# EAGLE board DigitalSandbox (EAGLE 6.5.0)
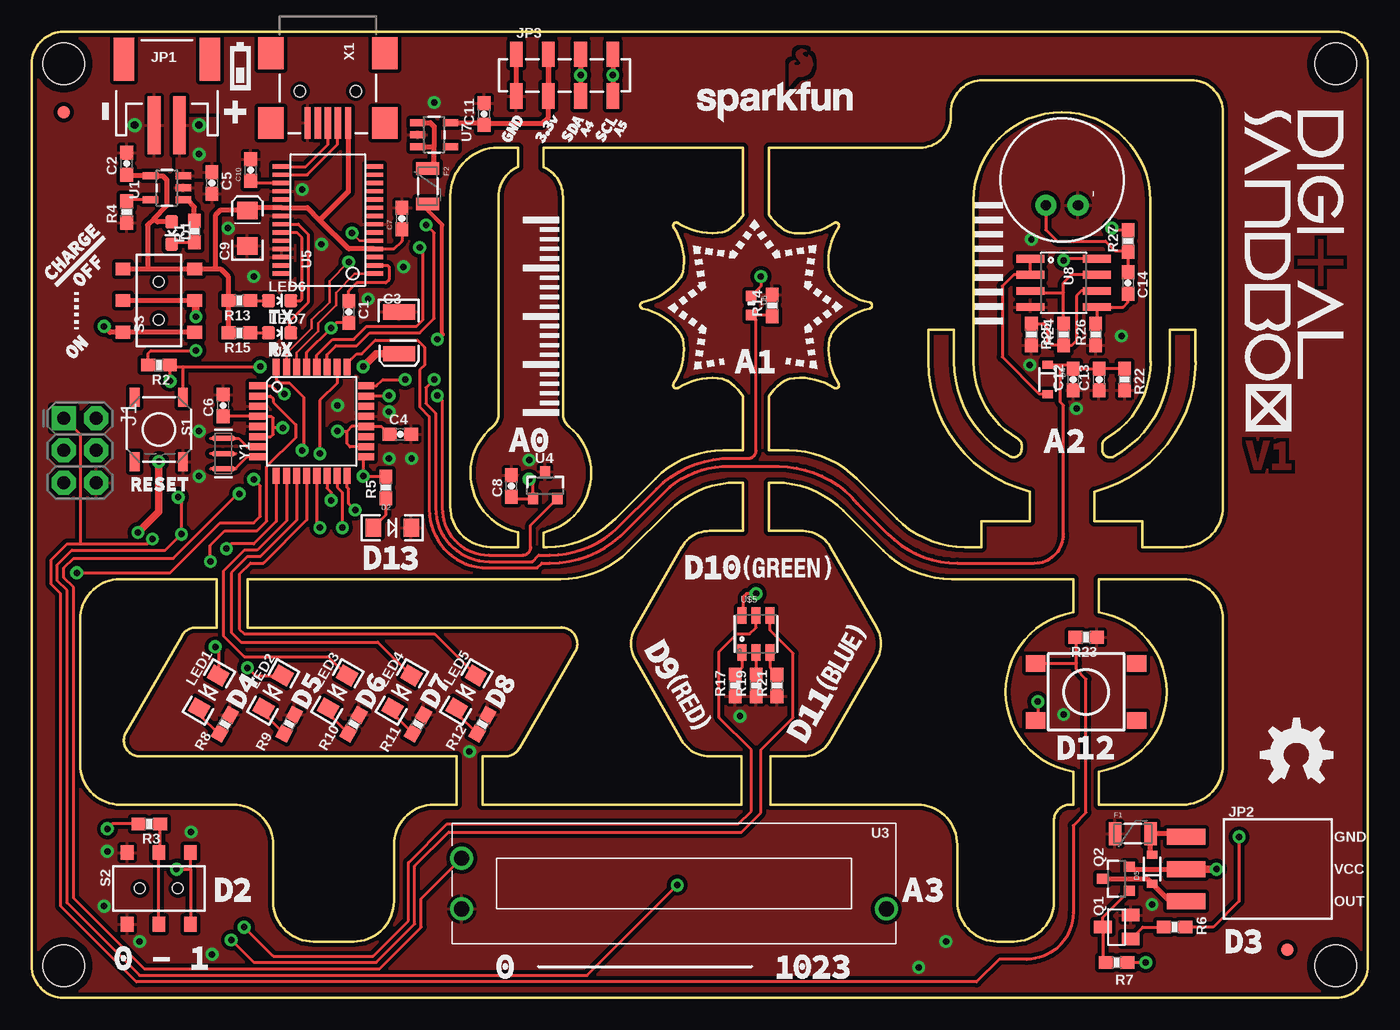
[diagram p0: board, top side]
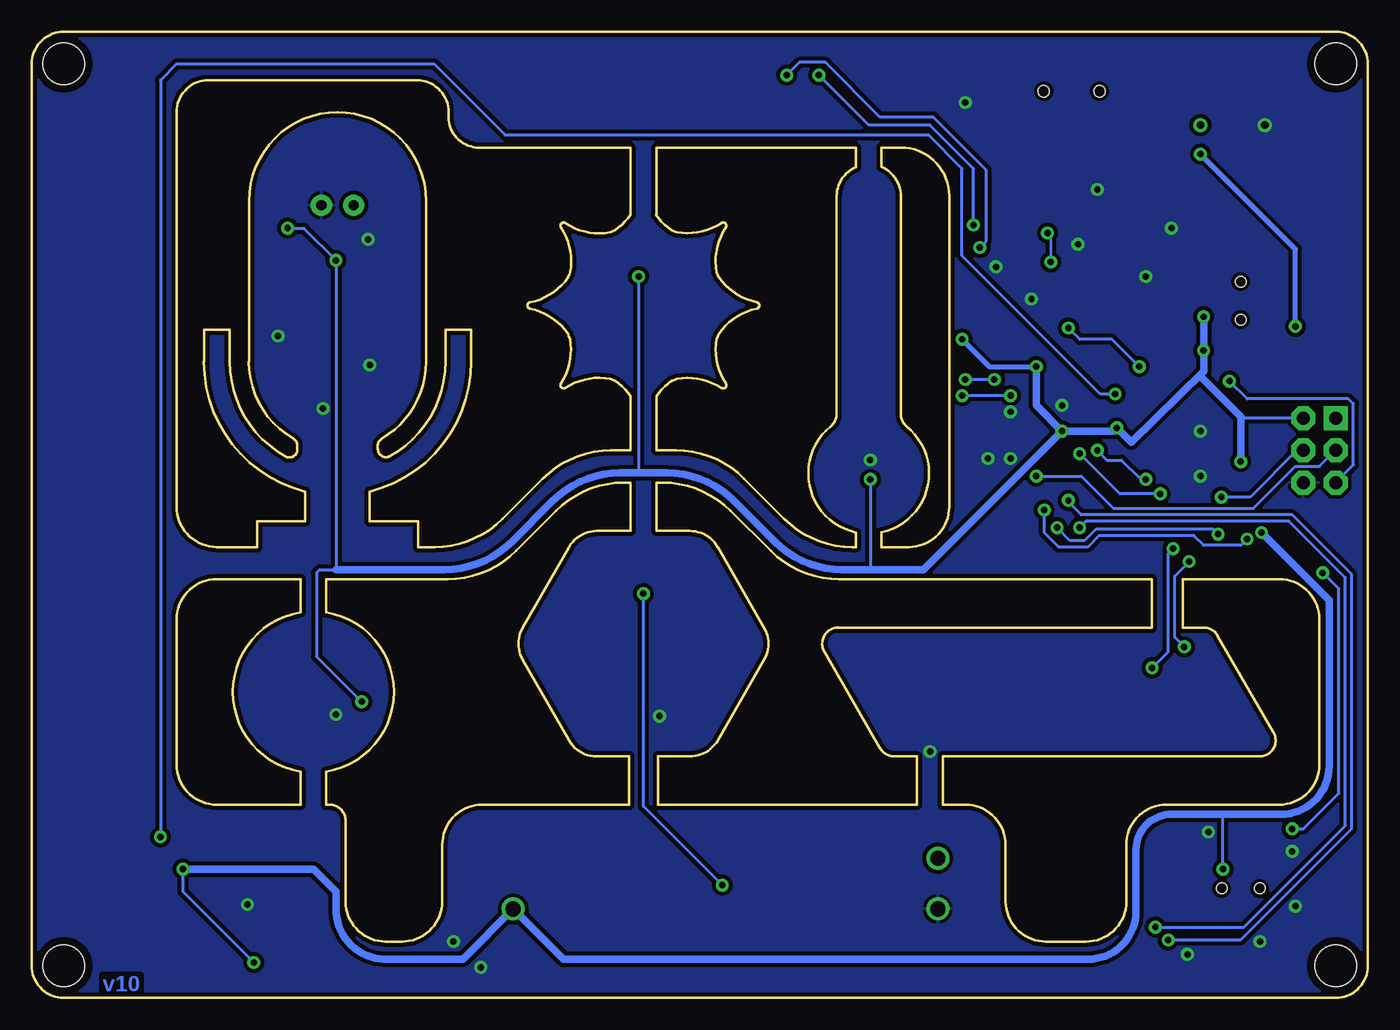
[diagram p1: board, bottom side, seen from below]

Size 105.41 x 76.2 mm. Coordinates in mm from the lower left corner, seen from the top.
Outline: 11.86,28.58 arc-60 12.95,29.21 14.61,29.21 14.61,33.02 6.99,33.02 arc90 3.81,29.84 3.81,18.41 arc90 6.99,15.24 15.88,15.24 arc-90 19.05,12.06 19.05,7.62 arc90 22.23,4.45 25.4,4.45 arc90 28.57,7.62 28.57,12.06 arc-90 31.75,15.24 33.53,15.24 33.53,19.05 8.56,19.05
Outline: 8.56,19.05 arc-120 7.44,20.95 11.86,28.57
Outline: 38.47,19.69 arc-60 37.36,19.05 35.56,19.05 35.56,15.24 56.01,15.24 56.01,19.05 53.49,19.05
Outline: 41.78,29.21 arc-119 42.88,27.3 38.48,19.68
Outline: 41.78,29.21 17.04,29.21 17.04,33.02 41.71,33.02 arc45 47.09,35.25
Outline: 47.09,35.26 50.27,38.41
Outline: 72.59,33.02 82.17,33.02 82.17,30.4 arc162 82.17,17.86 82.17,15.24 81.92,15.24 arc90 80.64,13.97 80.64,7.62 arc-90 77.47,4.45 76.2,4.45 arc-90 73.03,7.62 73.03,12.06 arc90 69.85,15.24 58.29,15.24 58.29,19.05 60.83,19.05 arc60 63.03,20.31
Outline: 59.72,43.18 58.17,43.18 58.17,47.45
Outline: 49.2,40.95 46.05,37.8
Outline: 54.51,60.37 arc-4 54.94,60.55 arc20 56.15,61.77
Outline: 51.22,56.82 arc-4 51.38,57.23 arc44 50.65,60.76
Outline: 51.38,51.97 arc-4 51.21,52.38 arc43 48.21,54.35
Outline: 54.93,48.64 arc-4 54.51,48.82 arc43 51.01,48.1
Outline: 59.79,48.83 arc-4 59.38,48.67 arc20 58.17,47.45
Outline: 63.11,52.37 arc-4 62.94,51.97 arc43 63.65,48.46
Outline: 62.93,57.22 arc-4 63.09,56.82 arc43 66.09,54.85
Outline: 59.38,60.55 arc-4 59.79,60.38 arc43 63.31,61.1
Outline: 60.83,36.83 58.17,36.83 58.17,40.64 58.67,40.64
Outline: 51.28,35.56 47.62,29.21 arc60 47.62,26.67 51.28,20.32 arc60 53.49,19.05
Outline: 51.29,35.56 arc-60 53.49,36.83 56.13,36.83 56.13,40.64 55.65,40.64 arc45 50.26,38.41
Outline: 60.83,36.83 arc-60 63.02,35.56 66.67,29.21 arc-60 66.67,26.67 63.02,20.32
Outline: 73.64,35.56 74.93,35.56 74.93,37.59 78.74,37.59 78.74,39.93
Outline: 78.74,39.93 arc-76 70.74,50.16 70.74,52.7 72.77,52.7 72.77,50.16 arc61 77.16,42.72
Outline: 77.17,42.72 arc118 78.09,43.26
Outline: 78.11,43.26 78.11,43.56 arc59 77.79,44.11
Outline: 77.8,44.11 arc-60 74.3,50.16 74.3,62.87 arc-180 88.27,62.87 88.27,50.16
Outline: 88.27,50.16 arc-60 84.78,44.12 arc60 84.46,43.56
Outline: 84.45,43.56 84.45,43.26 arc120 85.41,42.7
Outline: 85.39,42.72 arc61 89.78,50.16
Outline: 89.79,50.16 89.79,52.7 91.82,52.7 91.82,50.16
Outline: 91.83,50.16 arc-76 83.82,39.93 83.82,37.59 87.63,37.59 87.63,35.56 90.81,35.56 arc90 93.98,38.73 93.98,69.85 arc90 91.44,72.39 75.06,72.39 arc90 72.52,69.85 72.52,69.47 arc-90 70.1,67.06 58.17,67.06 58.17,61.77 arc20 59.38,60.55
Outline: 40.38,65.53 arc-67 41.91,63.2 41.91,46.05 arc52 42.39,45.06
Outline: 42.39,45.06 arc-128 40.39,36.7 40.39,35.56 40.66,35.56 arc45 46.05,37.79
Outline: 36.83,46.05 36.83,63.2
Outline: 36.84,46.05 arc-51 36.37,45.06 arc128 38.35,36.71
Outline: 36.83,63.2 arc-67 38.35,65.53 38.35,67.06 36.83,67.06 arc90 33.02,63.25 33.02,38.73 arc90 36.2,35.56 38.35,35.56 38.35,36.7
Outline: 72.59,33.02 arc-45 67.21,35.26 64.06,38.41 arc45 58.67,40.64
Outline: 73.64,35.56 arc-45 68.25,37.8 65.1,40.95 arc45 59.72,43.17
Outline: 49.2,40.95 arc-45 54.59,43.18 56.13,43.18 56.13,47.45 arc20 54.93,48.65
Outline: 56.13,61.77 56.13,67.06 40.39,67.06 40.39,65.53
Outline: 63.3,61.11 arc-156 63.65,60.76 arc44 62.93,57.23
Outline: 66.09,54.86 arc-157 66.09,54.36 arc43 63.09,52.38
Outline: 63.65,48.46 arc-156 63.3,48.11 arc43 59.79,48.83
Outline: 51,48.11 arc-156 50.65,48.46 arc43 51.37,51.97
Outline: 48.21,54.36 arc-157 48.21,54.86 arc43 51.19,56.83
Outline: 50.65,60.76 arc-156 51,61.11 arc43 54.51,60.39
Outline: 90.81,15.24 84.2,15.24 84.2,17.86 arc162 84.2,30.4 84.2,33.02 90.81,33.02 arc-90 93.98,29.84 93.98,18.41 arc-90 90.81,15.24
Outline: 102.87,0 2.54,0 arc-90 0,2.54 0,73.66 arc-90 2.54,76.2 102.87,76.2 arc-90 105.41,73.66 105.41,2.54 arc-90 102.87,0
Copper layers (1*16): Top 0.035mm / dielectric 1.5mm / Bottom 0.035mm
Design rules "SparkFun-2-layer": minimum track width 7mil, minimum drill 15mil, track to track 8mil, track to pad 8mil, pad to pad 8mil, via to via 8mil, smd to smd 8mil, copper to edge 8mil, drill to drill 8mil, minimum pad ring 12mil, minimum via ring 10mil, stop-mask expansion 4mil, vias tented up to drill 20mil, thermal gap 10mil
Net classes: 0 default: width 0.203 mm; 1 power: width 0.254 mm

## Footprints (pad centres in the part's own frame; a part is rotated, then mirrored left to right if it is on the bottom)
0603-CAP = smd 1.1 x 1: 1 -0.85,0; 2 0.85,0
EIA3528 = smd 1.2 x 2.5: A 1.65,0; C -1.65,0
EIA3216 = smd 1.4 x 1.6: A 1.4,0; C -1.4,0
LED-0603 = smd 1 x 1: A 0,-0.877; C 0,0.877
LED-1206 = smd 1.2 x 1.4: A -1.5,0; C 1.5,0
SOD-323 = smd 0.63 x 0.83: A 1.15,0; C -1.15,0
PTC-1206 = smd 1 x 1.8: 1 -1.4,0; 2 1.4,0
FIDUCIAL-1X2 = smd 1 x 1: 1 0,0
2X3-NS = drill 1.016 pad 1.88 square: 1 -2.54,-1.27 | drill 1.016 pad 1.88 octagon: 2 -2.54,1.27; 3 0,-1.27; 4 0,1.27; 5 2.54,-1.27; 6 2.54,1.27
JST-2-SMD = smd 1 x 4.6: 1 -1,-3.7; 2 1,-3.7 | smd 1.6 x 3.4: NC1 -3.4,1.5; NC2 3.4,1.5
1X03_SMD_RA_FEMALE = smd 1.25 x 3: 1 -2.54,7.225; 2 0,7.225; 3 2.54,7.225
1X04_SMD_STRAIGHT_COMBO = smd 1 x 2: 1 0,-1.65; 1-2 0,1.65; 2 2.54,1.65; 2-2 2.54,-1.65; 3 5.08,-1.65; 3-2 5.08,1.65; 4 7.62,1.65; 4-2 7.62,-1.65
SOT23 = smd 1 x 1.4: 1 -0.95,-1.1; 2 0.95,-1.1; 3 0,1.1
SOT23-3 = smd 0.8 x 0.9: 1 -0.95,-1; 2 0.95,-1; 3 0,1.1
0603-RES = smd 1.1 x 1: 1 -0.85,0; 2 0.85,0
TACTILE_SWITCH_SMD = smd 1.524 x 0.762: 1 -2.54,1.905; 2 2.54,1.905; 3 -2.54,-1.905; 4 2.54,-1.905
AYZ0202 = smd 1 x 1.15: 1 -2.5,2.825; 2 0,2.825; 3 2.5,2.825; 4 -2.5,-2.825; 5 0,-2.825; 6 2.5,-2.825 | hole 0.85: 1.5,0; -1.5,0
TACTILE_SWITCH_TALL = smd 1.55 x 1.3: A1 -3.975,-2.25; A2 3.975,-2.25; B1 -3.975,2.25; B2 3.975,2.25
STAND-OFF = hole 3.302: 0,0
SOT23-5 = smd 0.55 x 1.2: 1 -0.95,-1.3; 2 0,-1.3; 3 0.95,-1.3; 4 0.95,1.3; 5 -0.95,1.3
TQFP32-08 = smd 1.27 x 0.559: 1 -4.293,2.8; 2 -4.293,2; 3 -4.293,1.2; 4 -4.293,0.4; 5 -4.293,-0.4; 6 -4.293,-1.2; 7 -4.293,-2; 8 -4.293,-2.8; 17 4.293,-2.8; 18 4.293,-2; 19 4.293,-1.2; 20 4.293,-0.4; 21 4.293,0.4; 22 4.293,1.2; 23 4.293,2; 24 4.293,2.8 | smd 0.559 x 1.27: 9 -2.8,-4.293; 10 -2,-4.293; 11 -1.2,-4.293; 12 -0.4,-4.293; 13 0.4,-4.293; 14 1.2,-4.293; 15 2,-4.293; 16 2.8,-4.293; 25 2.8,4.293; 26 2,4.293; 27 1.2,4.293; 28 0.4,4.293; 29 -0.4,4.293; 30 -1.2,4.293; 31 -2,4.293; 32 -2.8,4.293
C2031N-1A2-B10K-GP = drill 1.2: 1 -16.75,2; 2 -16.75,-2; 3 16.75,-2
SSOP28DB = smd 0.348 x 1.397: 1 -4.225,-3.656; 2 -3.575,-3.656; 3 -2.925,-3.656; 4 -2.275,-3.656; 5 -1.625,-3.656; 6 -0.975,-3.656; 7 -0.325,-3.656; 8 0.325,-3.656; 9 0.975,-3.656; 10 1.625,-3.656; 11 2.275,-3.656; 12 2.925,-3.656; 13 3.575,-3.656; 14 4.225,-3.656; 15 4.225,3.656; 16 3.575,3.656; 17 2.925,3.656; 18 2.275,3.656; 19 1.625,3.656; 20 0.975,3.656; 21 0.325,3.656; 22 -0.325,3.656; 23 -0.975,3.656; 24 -1.625,3.656; 25 -2.275,3.656; 26 -2.925,3.656; 27 -3.575,3.656; 28 -4.225,3.656
ALS-PT19 = smd 0.8 x 0.8: C -0.75,0; E 0.75,0
SO08 = smd 0.61 x 2.21: 1 -1.905,-2.616; 2 -0.635,-2.616; 3 0.635,-2.616; 4 1.905,-2.616; 5 1.905,2.616; 6 0.635,2.616; 7 -0.635,2.616; 8 -1.905,2.616
MIC-9.7MM = drill 0.8 pad 1.676: 1 -2,1.27; 2 -2,-1.27
PLCC-6-LED = smd 0.7 x 1.3: AB -1.1,1.475; AG 1.1,1.475; AR 0,1.475; CB -1.1,-1.475; CG 1.1,-1.475; CR 0,-1.475
USB-MINIB = smd 2.5 x 0.5: D+ 2.5,0; D- 2.5,0.8; GND 2.5,-1.6; ID 2.5,-0.8; VBUS 2.5,1.6 | smd 2.5 x 2: MTN1 -3,4.5; MTN2 2.5,4.5; MTN3 -3,-4.5; MTN4 2.5,-4.5 | hole 0.9: 0,2.2; 0,-2.2
RESONATOR-SMD = smd 0.45 x 1.905: 1 -1.2,0; 2 0,0; 3 1.2,0

## Placement (x,y rotation side)
C1  0.1uF  [0603-CAP]  25.02,54.1 270 top
C2  4.7uF  [0603-CAP]  7.49,65.79 90 top
C3  47uF  [EIA3528]  28.99,52.45 270 top
C4  1.0uF  [0603-CAP]  29.08,44.45 0 top
C5  4.7uF  [0603-CAP]  14.22,64.26 270 top
C6  0.1uF  [0603-CAP]  15.11,46.74 90 top
C7  0.1uF  [0603-CAP]  29.21,61.47 90 top
C8  0.1uF  [0603-CAP]  37.85,40.39 90 top
C9  10uF  [EIA3216]  17.02,60.71 90 top
C10  0.1uF  [0603-CAP]  17.27,65.28 90 top
C11  0.1uF  [0603-CAP]  35.69,69.72 90 top
C12  0.1uF  [0603-CAP]  82.17,48.77 90 top
C13  0.1uF  [0603-CAP]  84.2,48.77 90 top
C14  0.1uF  [0603-CAP]  86.49,56.39 270 top
D1  Yellow  [LED-0603]  11.05,60.33 180 top
D2  RED  [LED-1206]  28.45,37.08 0 top
D4  [SOD-323]  80.14,48.77 270 top
D5  [SOD-323]  88.39,10.16 90 top
F1  PTCSMD  [PTC-1206]  86.87,12.95 0 top
F2  PTCSMD  [PTC-1206]  31.24,64.01 270 top
FID1  FIDUCIAL1X2  [FIDUCIAL-1X2]  99.06,3.81 0 top
FID2  FIDUCIAL1X2  [FIDUCIAL-1X2]  2.54,69.85 0 top
FRAME1  FRAME-LEDGER  [CREATIVE_COMMONS]  20.32,-7.62 0 top  (outside the outline)
J1  AVR_SPI_PRG_6NS  [2X3-NS]  3.81,43.18 270 top
JP1  LiPo  [JST-2-SMD]  10.67,72.52 0 top
JP2  [1X03_SMD_RA_FEMALE]  98.3,10.16 90 top
JP3  [1X04_SMD_STRAIGHT_COMBO]  38.23,72.77 0 top
LED1  White  [LED-1206]  13.97,24.13 240 top
LED2  White  [LED-1206]  19.05,24.13 240 top
LED3  White  [LED-1206]  24.13,24.13 240 top
LED4  White  [LED-1206]  29.21,24.13 240 top
LED5  White  [LED-1206]  34.29,24.13 240 top
LED6  Red  [LED-0603]  19.56,54.99 270 top
LED7  Green  [LED-0603]  19.56,52.45 270 top
Q1  MOSFET-N  [SOT23]  85.6,5.59 90 top
Q2  MOSFET-P  [SOT23-3]  85.6,9.4 90 top
R1  330  [0603-RES]  12.83,60.45 90 top
R2  10k  [0603-RES]  10.03,49.91 180 top
R3  10k  [0603-RES]  9.27,13.72 180 top
R4  10k  [0603-RES]  7.49,61.98 90 top
R5  330  [0603-RES]  27.94,40.26 90 top
R6  1k  [0603-RES]  90.17,5.59 0 top
R7  1k  [0603-RES]  85.6,2.79 180 top
R8  300  [0603-RES]  15.24,21.59 60 top
R9  300  [0603-RES]  20.32,21.59 62 top
R10  300  [0603-RES]  25.4,21.59 60 top
R11  300  [0603-RES]  30.48,21.59 60 top
R12  300  [0603-RES]  35.56,21.59 60 top
R13  1k  [0603-RES]  16.38,54.99 180 top
R14  10k  [0603-RES]  58.42,54.61 90 top
R15  1k  [0603-RES]  16.38,52.45 180 top
R17  300  [0603-RES]  55.5,24.64 90 top
R19  100  [0603-RES]  57.15,24.64 90 top
R21  100  [0603-RES]  58.8,24.64 90 top
R22  100k  [0603-RES]  86.23,48.77 270 top
R23  10k  [0603-RES]  83.19,28.45 180 top
R24  10k  [0603-RES]  81.41,52.32 90 top
R25  2.2k  [0603-RES]  78.87,52.32 270 top
R26  10k  [0603-RES]  83.95,52.32 90 top
R27  10k  [0603-RES]  86.49,59.69 90 top
S1  Reset  [TACTILE_SWITCH_SMD]  10.03,44.83 270 top
S2  [AYZ0202]  10.03,8.64 0 top
S3  On/Off  [AYZ0202]  10.03,54.99 90 top
S5  SWITCH-MOMENTARY-2SMD-4  [TACTILE_SWITCH_TALL]  83.19,24.13 180 top
STANDOFF1  STAND-OFF  [STAND-OFF]  102.87,73.66 0 top
STANDOFF2  STAND-OFF  [STAND-OFF]  102.87,2.54 0 top
STANDOFF3  STAND-OFF  [STAND-OFF]  2.54,2.54 0 top
STANDOFF4  STAND-OFF  [STAND-OFF]  2.54,73.66 0 top
U1  MCP73831  [SOT23-5]  10.67,63.88 90 top
U2  ATMEGA328  [TQFP32-08]  22.1,45.47 0 top
U3  10K_LINEAR_SLIDE_POT_SMALL  [C2031N-1A2-B10K-GP]  50.67,9.02 0 top
U4  MCP9700  [SOT23-3]  40.51,40.39 0 top
U5  FT232RLSSOP  [SSOP28DB]  23.37,61.34 90 top
U6  LIGHTSENSORALS  [ALS-PT19]  56.77,54.61 270 top
U7  V_REG_MIC52053.3V  [SOT23-5]  31.75,68.07 270 top
U8  LMV358SOIC  [SO08]  81.41,56.39 270 top
U9  MIC9.7MM  [MIC-9.7MM]  81.28,64.52 90 top
U$5  LED-TRICOLOR  [PLCC-6-LED]  57.15,28.7 0 top
X1  USBSMD  [USB-MINIB]  23.37,71.5 270 top
Y1  8MHz  [RESONATOR-SMD]  15.11,42.93 270 top

## Library data of the parts
C1 C6-C8 C10-C14 = SparkFun-Capacitors; PROD_ID: CAP-00810
C2 C5 = SparkFun-Capacitors; PROD_ID: CAP-08280
C3 = SparkFun-Capacitors; PROD_ID: CAP-08310
C4 = SparkFun-Capacitors; PROD_ID: CAP-00868
C9 = SparkFun-Capacitors; PROD_ID: CAP-00811
D1 = SparkFun-LED; PROD_ID: DIO-09003
D2 = SparkFun-LED; PROD_ID: DIO-00809
D4 D5 = SparkFun-DiscreteSemi; PROD_ID: DIO-09646
F1 F2 = SparkFun-PowerIC; PROD_ID: RES-11150
FID1 FID2 FRAME1 = SparkFun-Aesthetics
J1 JP3 = SparkFun-Connectors
JP1 = SparkFun-Connectors; PROD_ID: CONN-08352
JP2 = SparkFun-Connectors; PROD_ID: CONN-10926; VALUE: 1x3 RA Female .1"
LED1-LED5 = SparkFun-LED; PROD_ID: DIO-09955; VALUE: WHITE
LED6 = SparkFun-LED; PROD_ID: DIO-00819; VALUE: RED
LED7 = SparkFun-LED; PROD_ID: DIO-00821; VALUE: GREEN
Q1 = SparkFun-DiscreteSemi; PROD_ID: TRANS-00830
Q2 = SparkFun-DiscreteSemi; PROD_ID: TRANS-08285
R1 R5 = SparkFun-Resistors; PROD_ID: RES-00818
R2-R4 R14 R23 R24 R26 R27 = SparkFun-Resistors; PROD_ID: RES-00824; VALUE: 10K
R6 R7 R13 R15 = SparkFun-Resistors; PROD_ID: RES-07856; VALUE: 1K
R8-R12 R17 = SparkFun-Resistors; PROD_ID: RES_10328
R19 R21 = SparkFun-Resistors; PROD_ID: RES-07863
R22 = SparkFun-Resistors; PROD_ID: RES-07828
R25 = SparkFun-Resistors; PROD_ID: RES-08272
S1 = SparkFun-Electromechanical; PROD_ID: SWCH-08247
S2 S3 = SparkFun-Electromechanical; PROD_ID: SWCH-08179; VALUE: DPDT
S5 = SparkFun-Electromechanical; PROD_ID: SWCH-11966
STANDOFF1-STANDOFF4 = SparkFun-Electromechanical
U1 = SparkFun-PowerIC; PROD_ID: IC-09995
U2 = SparkFun-DigitalIC; PROD_ID: IC-09069; VALUE: ATMEGA328P
U3 = SparkFun-Resistors; PROD_ID: RES-11924
U4 = SparkFun-Sensors; PROD_ID: IC-08917
U5 = SparkFun-DigitalIC; PROD_ID: IC-00870
U6 = SparkFun-Sensors; PROD_ID: IC-11836
U7 = SparkFun-PowerIC; PROD_ID: VREG-00822; VALUE: 3.3V/150mA
U8 = SparkFun-AnalogIC; PROD_ID: IC-09657
U9 = SparkFun-Sensors; PROD_ID: COMP-08856
U$5 = SparkFun-LED; PROD_ID: DIO-12113
X1 = SparkFun-Connectors; PROD_ID: CONN-08193
Y1 = SparkFun-FreqCtrl; PROD_ID: XTAL-08895; VALUE: 8MHZ

## Nets
3.3V [power]: C10.1 U5.17
5V: C2.1 C7.1 C9.A D1.A R13.2 R15.2 S3.3 S3.6 U1.4 U5.4 U5.20 X1.VBUS
A0: U2.23 U4.2
A1: R14.1 U2.24 U6.E
A2: C12.2 C13.2 D4.C R22.1 U2.25
A3: U2.26 U3.1
A4: JP3.3 U2.27
A5: JP3.4 U2.28
BLUE: R17.2 U$5.CB
CTS: U5.11
D2: R3.2 U2.32
D3: R6.2 U2.1
D4: LED1.A U2.2
D5: LED2.A U2.9
D6: LED3.A U2.10
D7: LED4.A U2.11
D8: LED5.A U2.12
D9: U2.13 U$5.AR
D10: U2.14 U$5.AG
D11: J1.4 U2.15 U$5.AB
D12: J1.1 R23.2 S5.A2 U2.16
D13: J1.3 R5.2 U2.17
DTR: C1.1 U5.2
GND [power]: C2.2 C3.C C4.2 C5.2 C6.2 C7.2 C8.2 C9.C C10.2 C11.2 C12.1 C13.1 D2.C F1.1 J1.6 JP1.1 JP3.1 Q1.2 R4.1 R8.2 R9.2 R10.2 R11.2 R12.2 R14.2 R17.1 R19.1 R21.1 R22.2 R23.1 R25.2 R26.1 S1.2 S2.1 S2.4 U1.2 U2.3 U2.5 U2.21 U3.2 U4.3 U5.7 U5.18 U5.21 U5.25 U5.26 U7.2 U8.4 U9.2 X1.GND Y1.2
GRN: R21.2 U$5.CG
N$1: U2.7 Y1.1
N$2: D2.A R5.1
N$3: U2.8 Y1.3
N$4: Q1.3 Q2.1 R7.2
N$5: LED6.A R13.1
N$6: LED7.A R15.1
N$7 [power]: F2.1 U7.1 U7.3
N$8: D5.C JP2.1 Q2.3
N$9: LED3.C R10.1
N$10: Q1.1 R6.1
N$11: LED4.C R11.1
N$12: C11.1 JP3.2 U7.5
N$13: LED5.C R12.1
N$15: R3.1 S2.2 S2.5
N$16 [power]: D5.A F1.2 JP2.3
N$17: C14.1 R27.1 U9.1
N$18: LED1.C R8.1
N$20: C14.2 R26.2 U8.5
N$21: LED2.C R9.1
N$23: R24.1 R25.1 U8.6
N$24: D4.A U8.1 U8.2
N$26: R24.2 U8.3 U8.7
N$33: D1.C R1.1
PROG: R4.2 U1.5
RED: R19.2 U$5.CR
RST: C1.2 J1.5 R2.1 S1.1 U2.29
RXD: U2.30 U5.1
RXLED: LED7.C U5.22
STAT: R1.2 U1.1
TXD: U2.31 U5.5
TXLED: LED6.C U5.23
USB_D+: U5.15 X1.D+
USB_D-: U5.16 X1.D-
VBATT: C5.1 JP1.2 S3.1 S3.4 U1.3
VCC [power]: C3.A C4.1 C6.1 C8.1 F2.2 J1.2 JP2.2 Q2.2 R2.2 R7.1 R27.2 S2.3 S2.6 S3.2 S3.5 S5.B2 U2.4 U2.6 U2.18 U2.20 U3.3 U4.1 U6.C U8.8

## Tracks (layer width: path | path; a pad name or v marks a point on that pad's centre or on a via)
3.3V
  Top 0.254: U5.17 17.27,64.27 C10.1 17.27,64.52
5V
  Top 0.254: U5.4 28.59,59.07 29.21,59.69 C7.1
  Top 0.406: C2.1 7.49,64.83 U1.4 10.35,64.83 10.67,64.52 10.67,62.48 9.65,61.47 | D1.A 9.92,61.2 9.65,61.47 | R15.2 R13.2 15.49,55.03 15.49,56.9 14.9,57.49 14.48,57.49 | 14.48,57.49 14.48,61.72 14.86,62.11 C9.A 17.23,62.32 U5.20 21.76,62.32 22.73,61.34 | 9.65,61.47 9.14,60.96 9.14,57.49 | X1.VBUS 24.97,63.58 22.73,61.34 | U5.4 25.01,59.07 22.73,61.34 | 14.48,57.49 S3.6 9.14,57.49 | S3.3 9.14,57.49
A0  (via drill 0.51)
  Top 0.254: U2.23 26.42,47.5 v28.19,47.5 | v32,47.5 32.38,47.12 32.38,38.61 arc90 36.07,34.92 38.73,34.92 arc90 39.37,35.56 39.37,37.29 U4.2
  Bottom 0.254: v28.19,47.5 v32,47.5
A1  (via drill 0.51)
  Top 0.254: R14.1 58.32,53.86 U6.E 57.15,53.48 57.15,43.18 arc-90 56.52,42.55 54.48,42.55 arc40 49.28,40.13 46.23,37.08 arc-44 40.89,34.92 40.01,34.92 39.5,34.42 36.07,34.42 arc-90 31.88,38.61 31.88,46.1 31.11,46.86 31.11,48.13 v31.75,48.77 | U2.24 27.18,48.27 27.69,48.77 v29.46,48.77
  Bottom 0.254: v29.46,48.77 v31.75,48.77
A2
  Top 0.254: R22.1 C13.2 C12.2 arc90 81.87,49.92 81.15,49.92 | U2.25 24.9,50.04 25.65,50.8 26.04,50.8 27.1,51.87 30.43,51.87 30.99,51.31 30.99,49.91 30.61,49.53 30.61,46.61 31.37,45.85 31.37,38.48 arc90 35.94,33.91 39.88,33.91 40.26,34.29 40.89,34.29 arc47 46.99,36.96 49.91,39.88 arc-42 54.48,41.91 58.93,41.91 arc-50 65.15,38.99 67.56,36.58 arc45 73.03,34.29 79.12,34.29 arc90 81.41,36.58 81.41,46.74 81.15,46.99 81.15,49.92 | D4.C 81.15,49.92
A3  (via drill 0.51)
  Top 0.254: U2.26 24.1,48.48 22.73,47.12 v22.73,42.93 | v16.38,39.75 16.26,39.75 11.18,34.67 3.3,34.67 2.54,33.91 2.54,33.15 3.3,32.38 3.3,7.87 8.89,2.29 27.43,2.29 30.73,5.59 30.73,7.83 U3.1
  Bottom 0.254: v22.73,42.93 19.56,39.75 v16.38,39.75 | 34.45,11.02 U3.1
A4  (via drill 0.51)
  Top 0.254: U2.27 23.3,50.73 24,51.44 25.65,51.44 26.67,52.45 30.61,52.45 31.75,53.59 31.75,60.33 v31.11,60.96 | v43.31,72.77 JP3.3
  Bottom 0.254: v31.11,60.96 31.11,65.41 34.54,68.83 39.37,68.83 v43.31,72.77
A5  (via drill 0.51)
  Top 0.254: U2.28 22.5,50.69 23.75,51.94 25.4,51.94 26.42,52.96 30.35,52.96 30.86,53.47 30.86,58.93 v30.61,59.18 | v45.85,72.77 45.85,74.3 45.97,74.42 | JP3.4 45.97,74.42 | 45.97,74.42
  Bottom 0.254: v30.61,59.18 30.1,59.69 30.1,65.28 34.29,69.47 38.48,69.47 42.8,73.79 44.83,73.79 v45.85,72.77
BLUE
  Top 0.254: U$5.CB 56.05,26.04 R17.2
D2  (via drill 0.51)
  Top 0.254: U2.32 19.3,48.77 19.56,48.51 20.32,48.51 21.46,47.37 21.46,43.31 v21.34,43.18 | R3.2 6.35,13.72 v5.97,13.34 | v3.56,33.53 10.92,33.53 14.86,37.47 17.53,37.47 18.03,37.97 18.03,40.39 v17.53,40.89
  Bottom 0.254: v21.34,43.18 20.57,42.42 19.43,42.42 17.91,40.89 v17.53,40.89 | v5.97,13.34 5.08,13.34 2.29,16.13 2.29,32.26 v3.56,33.53
D3  (via drill 0.51)
  Top 0.254: U2.1 18.92,48.26 19.56,47.62 v19.94,47.62 | v95.25,12.7 95.25,7.62 93.22,5.59 R6.2
  Bottom 0.254: v19.94,47.62 21.08,47.62 32,58.55 32,65.41 34.67,68.07 68.07,68.07 73.66,73.66 93.98,73.66 95.25,72.39 v95.25,12.7
D4  (via drill 0.51)
  Top 0.254: U2.2 18.83,47.47 19.05,47.24 19.05,46.99 20.83,45.21 20.83,44.2 18.54,41.91 18.54,37.59 17.78,36.83 15.24,36.83 14.1,35.69 v14.1,34.42 | v14.48,27.69 14.73,27.43 14.73,25.42 | LED1.A 14.73,25.42 | 14.73,25.42 14.73,25.4
  Bottom 0.254: v14.48,27.69 15.24,28.45 15.24,33.27 v14.1,34.42
D5  (via drill 0.51)
  Top 0.254: U2.9 19.3,37.59 17.53,35.81 15.75,35.81 v15.37,35.43 | v17.02,26.04 17.65,25.4 19.81,25.4 19.81,25.42 LED2.A
  Bottom 0.254: v17.02,26.04 15.75,27.3 15.75,35.05 v15.37,35.43
D6
  Top 0.254: U2.10 20.1,37.62 17.78,35.31 16.76,35.31 15.11,33.66 15.11,28.57 16.76,26.92 23.39,26.92 LED3.A
D7
  Top 0.254: U2.11 20.9,37.66 18.03,34.8 17.02,34.8 15.75,33.53 15.75,28.83 16.51,28.07 27.3,28.07 29.96,25.41 | 29.97,25.4 29.96,25.41 | 29.96,25.41 LED4.A
D8
  Top 0.254: U2.12 21.7,37.7 18.29,34.29 17.27,34.29 16.38,33.4 16.38,29.08 16.76,28.7 31.77,28.7 LED5.A
D9  (via drill 0.51)
  Top 0.254: v16.76,5.59 19.05,3.3 26.92,3.3 29.72,6.1 29.72,10.67 32.77,13.72 55.75,13.72 56.77,14.73 56.77,19.56 54.23,22.1 54.23,27.3 55.63,28.7 56.64,28.7 57.15,29.21 U$5.AR | U2.13 22.5,37.32 v22.73,37.08
  Bottom 0.254: v16.76,5.59 9.78,5.59 1.78,13.59 1.78,33.15 6.22,37.59 22.23,37.59 v22.73,37.08
  pour Top: 97.87,42.1 97.87,41.7 99.38,41.7 99.38,42.1 98.9,42.1 98.9,43.82 98.54,43.82 98.51,43.81 98.45,43.77 98.39,43.75 98.36,43.73 98.33,43.72 98.29,43.71 98.26,43.7 98.22,43.68 98.18,43.67 98.15,43.66 98.11,43.65 98.06,43.65 97.98,43.63 97.98,43.32 98.41,43.32 98.41,42.1
D10  (via drill 0.51)
  Top 0.254: v15.75,4.57 17.53,2.79 27.18,2.79 30.23,5.84 30.23,10.41 32.89,13.08 56.01,13.08 57.53,14.61 57.53,19.56 60.07,22.1 60.07,27.18 58.25,29 U$5.AG | U2.14 23.3,40.2 23.62,39.88 v23.62,39.24
  Bottom 0.254: v15.75,4.57 10.03,4.57 1.27,13.34 1.27,33.4 5.97,38.1 22.61,38.1 23.62,39.12 v23.62,39.24 23.62,39.37
D11  (via drill 0.51)
  Top 0.254: U2.15 24.1,40.29 24.51,39.88 v24.51,37.08 | v11.56,39.5 11.81,39.24 v11.81,36.58 10.54,35.31 3.17,35.31 2.03,34.16 2.03,32.89 2.79,32.13 2.79,7.49 8.51,1.78 43.81,1.78 v50.93,8.89 | v57.15,31.88 56.39,31.88 56.13,31.62 56.13,30.22 U$5.AB
  Bottom 0.254: v11.81,36.58 12.19,36.96 21.46,36.96 22.35,36.07 23.5,36.07 v24.51,37.08 | J1.4 5.59,43.18 9.27,39.5 v11.56,39.5 | v50.93,8.89 57.15,15.11 v57.15,31.88
D12  (via drill 0.51)
  Top 0.254: 3.81,35.81 2.79,35.81 1.52,34.54 1.52,32.64 2.29,31.88 2.29,7.24 8.26,1.27 74.55,1.27 76.33,3.05 78.49,3.05 arc90 82.17,6.73 82.17,13.59 83.19,14.61 83.19,25.15 82.42,25.91 82.42,26.42 | 3.81,35.81 9.14,35.81 v9.53,36.2 | v25.53,38.48 25.02,38.99 25.02,40.13 24.9,40.25 U2.16 | J1.1 3.81,44.45 3.81,35.81 | 82.42,26.42 82.42,28.36 R23.2 | S5.A2 82.39,26.38 82.42,26.42
  Bottom 0.254: v9.53,36.2 10.03,35.69 12.95,35.69 13.72,36.45 21.21,36.45 22.1,35.56 24.38,35.56 25.53,36.7 v25.53,38.48
D13  (via drill 0.51)
  Top 0.254: U2.17 26.16,42.44 v26.16,41.15 27.94,41.15 R5.2
  Bottom 0.254: v26.16,41.15 22.61,41.15 20.07,38.61 9.02,38.61 5.71,41.91 3.81,41.91 J1.3
DTR
  Top 0.254: U5.2 28.09,57.77 28.19,57.66 28.19,56.64 27.94,56.39 25.65,56.39 25.02,55.75 C1.1
GND  (via drill 0.51, 0.6)
  other vias: 21.34,63.75 22.86,59.44 15.49,60.71 17.53,56.9 13.21,44.7 34.54,19.43 82.42,46.48 78.74,49.91 85.98,52.2 78.87,59.82 29.97,42.55 28.19,42.55 14.22,3.43 72.14,4.45 69.98,2.41 39.24,42.42 29.34,57.66 26.54,55.12 31.75,70.61 13.21,41.15 28.19,46.23 24.13,46.74 81.41,22.35 8.51,4.45 5.71,7.24 5.97,11.56 12.57,13.08 8.13,68.83 88.39,7.37 55.88,22.23
  pour Top (isolate 0.305, rank 6): 105.41,76.2 0,76.2 0,0 105.41,0
  pour Bottom (isolate 0.305, rank 6): 105.41,76.2 0,76.2 0,0 105.41,0
GRN
  Top 0.254: U$5.CG 58.25,26.04 R21.2
N$1
  Top 0.254: Y1.1 16.33,44.13 16.99,43.47 U2.7
N$2
  Top 0.254: R5.1 27.94,38.08 D2.A
N$3
  Top 0.254: U2.8 17.01,42.67 16.07,41.73 Y1.3
N$4
  Top 0.254: Q2.1 84.5,6.35 Q1.3 84.5,3.04 R7.2
N$5
  Top 0.254: R13.1 LED6.A
N$6
  Top 0.254: R15.1 LED7.A
N$7
  Top 0.406: U7.1 31.43,69.02 31.75,68.71 31.75,67.18 31.69,67.12 | U7.3 31.69,67.12 | 31.69,67.12 31.69,65.86 F2.1
N$8
  Top 0.406: Q2.3 88,9.4 D5.C 89.78,7.62 JP2.1
N$9
  Top 0.254: LED3.C 23.38,22.45 R10.1
N$10
  Top 0.254: Q1.1 87.65,5.59 R6.1
N$11
  Top 0.254: LED4.C 28.46,22.45 R11.1
N$12
  Top 0.406: JP3.2 40.77,69.47 40.26,68.96 35.94,68.96 35.85,68.87 C11.1 35.54,69.02 U7.5
N$13
  Top 0.254: LED5.C 33.54,22.45 R12.1
N$14
  pour Top: 101.89,57.81 103.49,57.81 103.49,58.21 101.89,58.21 101.89,59.8 101.49,59.8 101.49,58.21 99.89,58.21 99.89,57.81 101.49,57.81 101.49,56.21 101.89,56.21
N$15
  Top 0.254: 10.12,5.72 10.03,5.72 S2.5 S2.2 10.12,11.46 R3.1
N$16
  Top 0.406: JP2.3 90.82,12.95 F1.2 88.27,11.43 D5.A
N$17
  Top 0.254: U9.1 80.01,60.58 80.9,59.69 84.71,59.69 85.47,58.93 86.4,58.93 R27.1 C14.1
N$18
  Top 0.254: LED1.C 13.22,22.34 14.73,20.83 14.79,20.83 R8.1
N$19
  pour Top: 61.26,74.36 61.27,74.25 61.26,74.24 61.26,74.22 61.25,74.21 61.24,74.19 61.18,74.16 61.12,74.16 61.1,74.17 61.08,74.17 61,74.21 60.98,74.23 60.96,74.24 60.94,74.26 60.92,74.27 60.9,74.29 60.88,74.3 60.87,74.32 60.85,74.34 60.82,74.4 60.81,74.41 60.8,74.43 60.8,74.5 60.81,74.52 60.81,74.53 60.82,74.55 60.83,74.56 60.84,74.58 60.89,74.63 60.92,74.64 60.96,74.66 60.99,74.67 61.01,74.67 61.03,74.68 61.09,74.68 61.11,74.67 61.13,74.67 61.12,74.68 61.1,74.69 61.08,74.71 61.05,74.73 61.01,74.75 60.97,74.76 60.93,74.78 60.88,74.79 60.82,74.8 60.77,74.81 60.71,74.81 60.65,74.8 60.59,74.78 60.52,74.75 60.46,74.71 60.41,74.67 60.37,74.62 60.33,74.58 60.31,74.53 60.29,74.49 60.27,74.39 60.29,74.29 60.31,74.25 60.33,74.2 60.36,74.15 60.44,74.05 60.49,74.01 60.58,73.92 60.61,73.88 60.63,73.83 60.65,73.79 60.65,73.68 60.63,73.64 60.61,73.61 60.58,73.58 60.52,73.54 60.48,73.52 60.44,73.51 60.34,73.51 60.31,73.52 60.28,73.52 60.26,73.53 60.23,73.54 60.21,73.56 60.19,73.57 60.18,73.59 60.15,73.62 60.13,73.66 60.13,73.73 60.14,73.75 60.15,73.76 60.15,73.78 60.16,73.79 60.18,73.8 60.2,73.82 60.22,73.83 60.24,73.85 60.25,73.85 60.27,73.86 60.28,73.87 60.29,73.87 60.28,73.88 60.26,73.88 60.24,73.89 60.08,73.89 59.96,73.85 59.93,73.83 59.91,73.82 59.88,73.8 59.84,73.76 59.82,73.73 59.8,73.71 59.78,73.67 59.77,73.64 59.75,73.6 59.74,73.56 59.74,73.52 59.73,73.47 59.73,73.36 59.76,71.92 59.77,71.92 59.77,71.93 59.79,71.95 59.8,71.97 59.82,71.99 59.84,72.02 59.89,72.07 59.91,72.1 59.94,72.14 60,72.2 60.09,72.32 60.13,72.36 60.16,72.4 60.2,72.43 60.23,72.47 60.26,72.5 60.28,72.53 60.31,72.56 60.34,72.58 60.37,72.61 60.4,72.63 60.42,72.64 60.45,72.66 60.49,72.67 60.52,72.67 60.56,72.68 60.74,72.68 60.8,72.69 60.87,72.7 61.05,72.76 61.11,72.79 61.16,72.82 61.26,72.9 61.3,72.94 61.35,72.98 61.43,73.08 61.46,73.13 61.52,73.24 61.57,73.34 61.6,73.44 61.62,73.55 61.63,73.65 61.63,73.74 61.61,73.84 61.59,73.92 61.57,74.01 61.53,74.08 61.5,74.15 61.45,74.21 61.41,74.27 61.36,74.31 61.31,74.34
N$20
  Top 0.254: R26.2 84.02,53.25 U8.5 86.11,54.48 86.49,54.86 C14.2
N$21
  Top 0.254: LED2.C 18.3,22.46 R9.1
N$22
  pour Top: 97.67,43.88 97.17,43.88 96.92,42.86 96.91,42.82 96.89,42.78 96.88,42.73 96.86,42.65 96.85,42.6 96.83,42.52 96.82,42.47 96.8,42.39 96.79,42.34 96.78,42.3 96.76,42.26 96.75,42.21 96.74,42.17 96.73,42.17 96.72,42.21 96.7,42.26 96.68,42.34 96.67,42.39 96.65,42.47 96.64,42.52 96.62,42.6 96.61,42.65 96.59,42.73 96.58,42.78 96.57,42.82 96.55,42.86 96.29,43.88 95.77,43.88 96.43,41.7 97.02,41.7
N$23
  Top 0.254: U8.6 82.8,55.75 82.42,55.37 82.42,51.82 82.08,51.47 R24.1 80.48,51.47 80.14,51.82 80.14,52.83 79.8,53.17 R25.1
N$24
  Top 0.254: U8.1 U8.2 77.47,57.02 76.58,56.13 76.58,50.55 79.51,47.62 D4.A
N$26
  Top 0.254: R24.2 81.41,55.63 | 81.41,55.63 81.41,56.39 82.04,57.02 U8.7 | U8.3 78.79,55.63 81.41,55.63
N$33
  Top 0.254: D1.C 11.08,59.6 R1.1
PROG
  Top 0.254: U1.5 7.6,62.93 R4.2
RED
  Top 0.254: U$5.CR R19.2
RST  (via drill 0.51)
  Top 0.254: U2.29 21.7,50.91 v23.62,52.83 24.04,53.25 C1.2 | S1.1 11.94,49.78 | 11.94,49.78 11.01,49.78 R2.1 10.92,49.87 v10.92,48.64 | 11.94,49.78 v18.03,49.78
  Bottom 0.254: v18.03,49.78 20.19,51.94 22.73,51.94 v23.62,52.83 | J1.5 1.14,42.04 1.14,46.86 1.52,47.24 9.53,47.24 v10.92,48.64
RXD
  Top 0.203: U5.1 25.49,57.12 24,55.63 24,54.61 22.61,53.21 22.61,52.58 20.9,50.87 U2.30
RXLED
  Top 0.254: LED7.C 20.31,53.33 21.84,54.86 21.84,60.2 21.03,61.02 U5.22
STAT
  Top 0.406: U1.1 12.25,62.93 12.83,62.36 R1.2
TXD  (via drill 0.51)
  Top 0.203: U2.31 20.1,50.83 22.1,52.83 22.1,53.47 23.5,54.86 23.5,56.52 v25.02,58.04 | v25.27,60.33 25.88,59.72 U5.5
  Bottom 0.203: v25.02,58.04 25.02,60.07 v25.27,60.33
TXLED
  Top 0.254: LED6.C 21.21,54.99 21.34,55.12 21.34,59.94 20.91,60.37 U5.23
USB_D+
  Top 0.254: U5.15 21.62,65.57 23.37,67.31 X1.D+
USB_D-
  Top 0.254: U5.16 21.74,64.92 24.13,67.31 24.13,68.96 X1.D-
VBATT  (via drill 0.51, 0.6)
  Top 0.406: S3.1 S3.4 6.18,52.49 v5.71,52.96
  Bottom 0.406: v5.71,52.96 5.71,59.05 v13.21,66.55
  other vias: 13.21,68.83
  pour Top (isolate 0.305, rank 2): 11.43,64.77 14.48,64.77 14.48,69.34 11.43,69.34
VCC  (via drill 0.51)
  Top 0.254: C6.1 15.13,45.87 U2.4 18.9,45.87 19.05,45.72 19.05,44.96 | U2.6 18.87,44.27 19.05,44.45 19.05,44.96 | 24.89,44.7 25.25,45.07 U2.20 27.58,45.07 28.19,44.45 C4.1 | U2.18 25.11,43.47 24.89,43.69 24.89,44.7 | v24.13,44.7 24.89,44.7 | v19.81,44.96 19.05,44.96 | v39.24,40.89 39.56,40.57 U4.1 38,39.39 C8.1 | R27.2 85.38,60.54 v85.22,60.71 | U8.8 81.53,58.29 v81.41,58.17 | v11.43,10.16 12.53,10.16 | v93.47,10.16 93.18,9.87 | C3.A 28.96,50.8 | v57.53,56.9 57.53,56.12 U6.C | R2.2 9.18,50.84 9.4,51.05 v12.95,51.05 | R7.1 v87.88,2.79 | v79.38,23.37 79.38,22.05 S5.B2 | 12.53,10.16 S2.3 | 12.53,10.16 S2.6
  Top 0.305: 32.38,52.32 32.38,60.96 31.24,62.1 F2.2
  Top 0.406: S3.5 S3.2 | 32.38,52.32 v32,51.94 | Q2.2 86.79,10.16 JP2.2
  Top 0.61: v12.95,53.72 12.95,54.86 12.88,54.94 arc-45 S3.5 | v26.16,49.78 27.18,50.8 28.96,50.8 | v93.47,10.16 JP2.2 | v10.03,42.29 10.03,38.35 v8.38,36.7
  Bottom 0.254: v39.24,40.89 39.24,33.78 | v57.53,56.9 57.53,41.4 | v85.22,60.71 83.95,60.71 v81.41,58.17 81.41,33.78 82.68,33.78 82.93,33.53 82.93,26.92 v79.38,23.37 | v11.43,10.16 11.43,14.48 11.18,14.48 | J1.2 9.91,45.72 10.03,45.85 | v87.88,2.79 93.47,8.38 v93.47,10.16 | 57.15,41.4 56.9,41.4
  Bottom 0.406: v32,51.94 29.84,49.78 v26.16,49.78
  Bottom 0.61: v24.13,44.7 20.07,44.7 v19.81,44.96 18.67,43.81 12.95,49.4 | 81.41,33.78 72.83,33.78 arc-45 67.53,35.98 64.3,39.2 arc45 59,41.4 57.53,41.4 56.9,41.4 55.3,41.4 arc45 50,39.2 46.77,35.98 arc-45 41.47,33.78 39.24,33.78 35.05,33.78 v24.13,44.7 | v93.47,10.16 83.19,10.16 81.41,8.38 81.41,7.11 arc-90 77.6,3.05 71.39,3.05 U3.3 63.45,3.05 22.1,3.05 arc-90 18.29,6.86 18.29,11.68 arc90 15.49,14.48 11.18,14.48 6.86,14.48 arc-90 3.05,18.29 3.05,31.37 v8.38,36.7 | v26.16,49.78 26.16,46.74 v24.13,44.7 | v12.95,53.72 v12.95,51.05 12.95,49.4 | 12.95,49.4 13.21,49.15 13.21,49.02 10.03,45.85 v10.03,42.29

## Text on the board
Bottom: v10
tPlace: GND | VCC | OUT
tNames: Casey Kuhns